# Altium PCB altium.pcbdoc
Units mil, origin at the board's own origin, x right, y up, seen from the top; angles counter-clockwise.
Board outline 3679 x 2940 mil, 2 copper layers (Top Layer, Bottom Layer); 20 components, 40 nets, 93 pads, 0 vias.
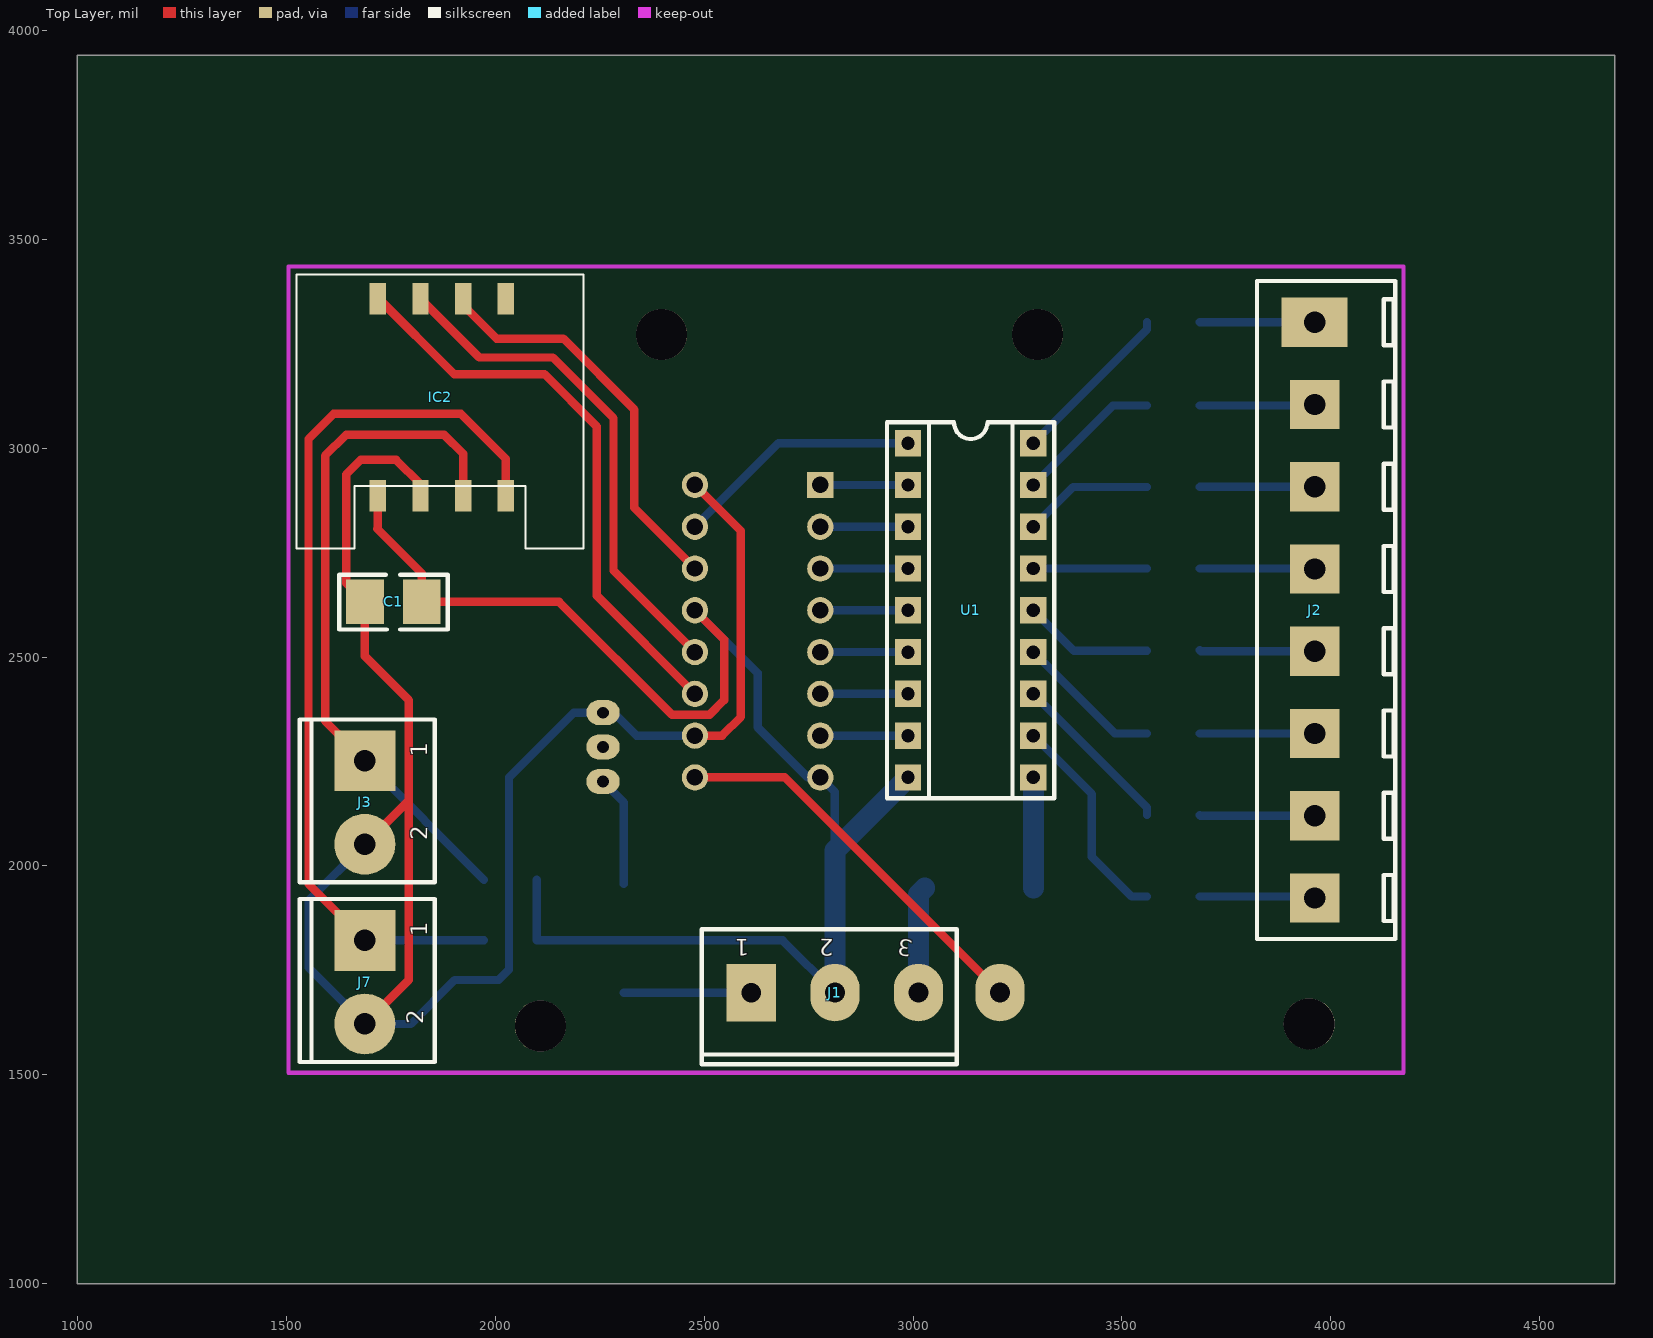
[diagram p0: Top Layer view]
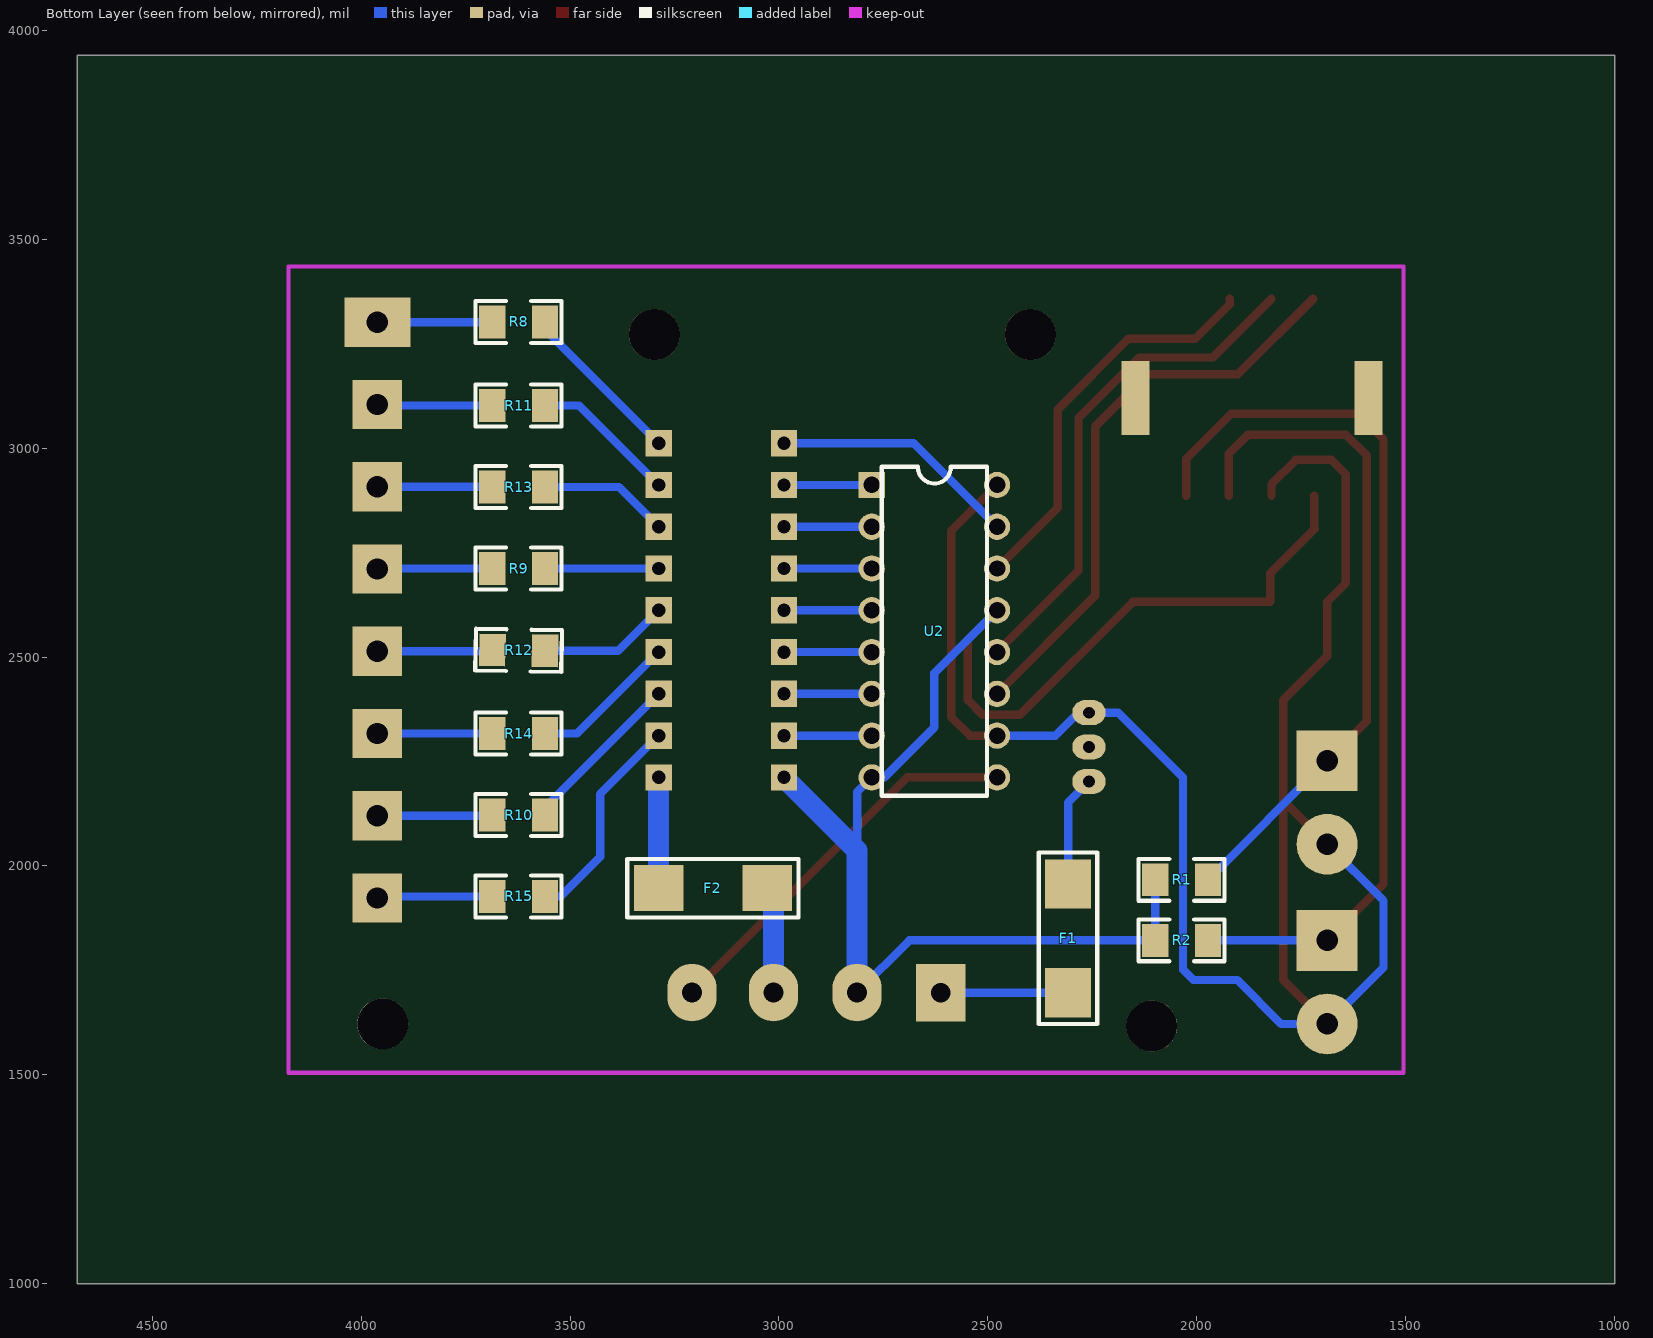
[diagram p1: Bottom Layer view, seen from below]

## Layer stack, top to bottom
Top Layer: signal copper (thickness not stored)
Dielectric: dielectric 12.6, FR-4, Dk 4.8
Bottom Layer: signal copper (thickness not stored)

## Board outline
4679,1000 1000,1000 1000,3940 4679,3940

## Components (designator, comment, footprint, x,y, rotation, side; value= is the part's Value field where it differs from the comment)
C1 "100nF" 1210 1756,2632 r180 top
F1 "NO" OMF_125 2323,1797 r90 bottom
F2 "NO" OMF_125 3188,1962 r180 bottom
IC2 "TR-72D" IQRF_KON-SIM-01 1868,3162 r180 top
J1 "KF127_3P_5.08" KF127_3P_5.08 2813.24,1690.94 r270 top
J2 "KF127-8P" KF127-8P 3960.99,2632 r0 top
J3 "Fotgjengerovergangknapp 2" KF127_2P_5.08 1678,2162 r0 top
J7 "Fotgjengerovergang knapp 1" KF127_2P_5.08 1678,1732 r0 top
R1 "5.1K" 1206 2035.99,1967 r180 bottom
R2 "5.1K" 1206 2035.99,1822 r180 bottom
R8 "160" 1206 3623,3302 r180 bottom
R9 "160" 1206 3623,2712 r180 bottom
R10 "160" 1206 3623,2122 r180 bottom
R11 "180" 1206 3623,3102 r180 bottom
R12 "180" 1206 3623.01,2515.9 r181 bottom
R13 "200" 1206 3623,2907 r180 bottom
R14 "200" 1206 3623,2317 r180 bottom
R15 "200" 1206 3623,1927 r180 bottom
U1 "TBD62083APG" DIP-18 3138,2612 r270 top
U2 "SN74HC595N" DIP-16_L19.8-W6.5-P2.54-LS7.6-BL 2628,2562 r90 bottom

## Footprints (in the part's own frame and the unit in brackets; to place one, negate y for a bottom-side part, rotate by r counter-clockwise, add the part's x,y. Pads: shape width x height; smd on the part's side, far side on the other; paste and mask are expansions set on the pad)
1206 [mil]
  rect 63x78.74 smd: 1(62.99,0) 2(-62.99,0)
  silkscreen extent -103,-50 103,50
1210 [mil]
  rect 90.55x106.3 smd: 1(-68,0) 2(68,0)
  silkscreen extent -130,-65 129,66
DIP-16_L19.8-W6.5-P2.54-LS7.6-BL [mm]
  rect 1.6x1.6 hole 1: 1(8.89,3.81)
  round 1.6 hole 1: 2(6.35,3.81) 3(3.81,3.81) 4(1.27,3.81) 5(-1.27,3.81) 6(-3.81,3.81) 7(-6.35,3.81) 8(-8.89,3.81) 9(-8.89,-3.81) 10(-6.35,-3.81) 11(-3.81,-3.81) 12(-1.27,-3.81) 13(1.27,-3.81) 14(3.81,-3.81) 15(6.35,-3.81) 16(8.89,-3.81)
  silkscreen extent -10,-3.2 10,3.2
DIP-18 [mil]
  rect 63x63 hole 32: 1(-400,-150) 2(-300,-150) 3(-200,-150) 4(-100,-150) 5(0,-150) 6(100,-150) 7(200,-150) 8(300,-150) 9(400,-150) 10(400,150) 11(300,150) 12(200,150) 13(100,150) 14(0,150) 15(-100,150) 16(-200,150) 17(-300,150) 18(-400,150)
  silkscreen extent -450,-200 450,200
IQRF_KON-SIM-01 [mm]
  rect 1x1.9 smd: 1(-4.002,7.002) 2(-1.401,7.002) 3(1.19,7.002) 4(3.781,7.002) 5(-4.002,-4.969) 6(-1.401,-4.969) 7(1.19,-4.969) 8(3.781,-4.969)
  rect 1.7x4.5 smd far side: 9(-7.08,1.07) 9(7.079,1.07)
  silkscreen extent -8.72,-6.43 8.72,10.22
KF127-8P [mm]
  rect 4x3 hole 1.3: 1(0,17)
  rect 3x3 hole 1.3: 2(0,12) 3(0,7) 4(0,2) 5(0,-3) 6(0,-8) 7(0,-13) 8(0,-18)
  silkscreen extent -3.5,-20.5 4.9,19.5
KF127_2P_5.08 [mil]
  rect 145.67x145.67 hole 51.18: 1(10,90)
  round 145.67 hole 51.18: 2(10,-110)
  silkscreen extent -146,-201 177,189
KF127_3P_5.08 [mm]
  rect 3.5x3 hole 1.2: 1(-0.15,-5.1)
  oval 3.5x3 hole 1.2: 2(-0.154,-0.006) 3(-0.154,5.074)
  silkscreen extent -4,-8.1 4.2,7.4
OMF_125 [mm]
  rect 3x2.8 smd: 1(4.064,-0.381) 2(-2.54,-0.381)
  silkscreen extent -4.44,-2.16 5.97,1.4

## Free pads (board coordinates)
  oval 80x60 hole 28: 3(2258,2202) 3(2258,2285) 3(2258,2367)
  oval 118.11x137.79 hole 47.24: 3(3208,1697)
  round 122 hole 122 unplated: ""(2108,1617) ""(2398,3272) ""(3298,3272) ""(3948,1622)

## Nets (pads, with @x,y where several pads share a name; then routed paths per layer and width w, separated by ;. In a path a pad name is that pad's centre, name@x,y a point inside that pad or via, vN(x,y) a via of type N, cw(c..) or ccw(c..) an arc to the next point about the centre after c; other vN are vias at no path point)
0: pad.3@2258,2285
+5V: C1.2 IC2.3 J3.2 J7.2 pad.3@2258,2367 U2.10 U2.16 | length 4475.2
  Top Layer w20: J7.2 1793,1727 1793,2157 ; J3.2 1793,2157 ; IC2.3 1821.14,2913.86 1763,2972 1678,2972 1643,2937 1643,2677 C1.2 1688,2502 1793,2397 1793,2157 ; U2.10 2543,2312 2588,2357 2588,2802 U2.16
  Bottom Layer w20: J3.2 1553,1917 1553,1757 J7.2 1798,1622 1903,1727 2008,1727 2033,1752 2033,2212 2188,2367 2258,2367 2283,2367 2338,2312 U2.10
+12V: F2.2 U1.10 | length 265
  Bottom Layer w50: F2.2 U1.10
C1/BTN1/LEFT: IC2.1 J7.1 R2.1 | length 2171
  Top Layer w20: J7.1 1553,1957 1553,3022 1613,3082 1838,3082 1918,3082 2025.54,2974.46 IC2.1
  Bottom Layer w20: J7.1 R2.1
C2/BTN2/RIGHT: IC2.2 J3.1 R1.1 | length 1642.5
  Top Layer w20: J3.1 1593,2347 1593,2982 1643,3032 1878,3032 1923.1,2986.9 IC2.2
  Bottom Layer w20: J3.1 R1.1
C6/DATA: IC2.6 U2.14 | length 970
  Top Layer w20: IC2.6@1921.14,3357.63 1921.14,3343.86 2003,3262 2163,3262 2333,3092 2333,2857 U2.14
C7/STROBE: IC2.7 U2.12 | length 1220.9
  Top Layer w20: IC2.7 1961.77,3217 2138,3217 2283,3072 2283,2707 U2.12
C8/CLK: IC2.8 U2.11 | length 1385.8
  Top Layer w20: IC2.8@1721.14,3357.63 1901.77,3177 2118,3177 2243,3052 2243,2647 U2.11
FHGREEN: J2.7 R10.2 | length 275.7
  Bottom Layer w20: R10.2 3687.8,2120.19 J2.7
FHRED: J2.8 R15.2 | length 276.5
  Bottom Layer w20: R15.2 3957.33,1927 J2.8
GND: C1.1 IC2.4 J1.2 R1.2 R2.2 U1.9 U2.8 U2.13 | length 3622.7
  Top Layer w20: IC2.4 1719.14,2808.14 1718,2807 1824,2701 C1.1 2153,2632 2423,2362 2513,2362 2548,2397 2548,2542 U2.13
  Bottom Layer w20: R1.2 R2.2 2688,1822 J1.2 ; U2.13 2628,2462 2628,2332 2748,2212 U2.8 2813,2177 2813,2037
  Bottom Layer w50: J1.2 2813,2037 U1.9
J1_1: F1.2 J1.1 | length 304.5
  Bottom Layer w20: F1.2 2612.29,1697 J1.1
J1_3: F2.1 J1.3 | length 256.2
  Bottom Layer w50: J1.3 3013,1932 F2.1
KEY1_3: F1.1 pad.3@2258,2202 | length 265.7
  Bottom Layer w20: pad.3@2258,2202 2308,2152 F1.1
O1: U1.1 U2.15 | length 592.8
  Bottom Layer w20: U2.15 2678,3012 U1.1
O2: U1.2 U2.1 | length 210
  Bottom Layer w20: U2.1 U1.2
O3: U1.3 U2.2 | length 210
  Bottom Layer w20: U2.2 U1.3
O4: U1.4 U2.3 | length 210
  Bottom Layer w20: U2.3 U1.4
O5: U1.5 U2.4 | length 210
  Bottom Layer w20: U2.4 U1.5
O6: U1.6 U2.5 | length 210
  Bottom Layer w20: U2.5 U1.6
O7: U1.7 U2.6 | length 210
  Bottom Layer w20: U2.6 U1.7
O8: U1.8 U2.7 | length 210
  Bottom Layer w20: U2.7 U1.8
R2_1: IC2.5
RFGREEN: J2.1 R8.2 | length 275.3
  Bottom Layer w20: R8.2 3686.7,3301.29 J2.1
RFRED: J2.3 R13.2 | length 275.2
  Bottom Layer w20: R13.2 3686.58,2907.59 J2.3
RFYELLOW: J2.2 R11.2 | length 276
  Bottom Layer w20: R11.2 3958.55,3102 J2.2
S$22: 
S$71: 
U1_11: R15.1 U1.11 | length 519.4
  Bottom Layer w20: U1.11 3428,2172 3428,2022 3523,1927 R15.1
U1_12: R10.1 U1.12 | length 402.7
  Bottom Layer w20: U1.12 3560.01,2139.99 R10.1
U1_13: R14.1 U1.13 | length 352.8
  Bottom Layer w20: U1.13 3483,2317 R14.1
U1_14: R12.1 U1.14 | length 312.3
  Bottom Layer w20: U1.14 3385.2,2514.8 R12.1
U1_15: R9.1 U1.15 | length 272
  Bottom Layer w20: U1.15 R9.1
U1_16: R13.1 U1.16 | length 311.4
  Bottom Layer w20: U1.16 3383,2907 R13.1
U1_17: R11.1 U1.17 | length 350.7
  Bottom Layer w20: U1.17 3478,3102 R11.1
U1_18: R8.1 U1.18 | length 402.7
  Bottom Layer w20: U1.18 3560.01,3284.01 R8.1
U2_9: pad.3@3208,1697 U2.9 | length 943.3
  Top Layer w20: U2.9 2693,2212 pad.3@3208,1697
VGREEN: J2.4 R9.2 | length 275.5
  Bottom Layer w20: R9.2 3959.73,2712 J2.4
VRED: J2.6 R14.2 | length 275
  Bottom Layer w20: R14.2 3960.95,2317 J2.6
VYELLOW: J2.5 R12.2 | length 276.3
  Bottom Layer w20: R12.2 3689.1,2513.89 J2.5
pads on no net: IC2.9

## Text inside footprints (layer, text, board x,y; h text height)
J1: Top Overlay "1" at 2608.51,1824.8 h39.37 r180; Top Overlay "2" at 2809.64,1824.79 h39.37 r179; Top Overlay "3" at 3001.76,1821.32 h39.37 r169
J3: Top Overlay "1" at 1837.68,2262 h39.37 r90; Top Overlay "2" at 1837.68,2061.66 h39.37 r89
J7: Top Overlay "1" at 1837.68,1832 h39.37 r90; Top Overlay "2" at 1827.68,1621.66 h39.37 r89